# Altium PCB PCB.PcbDoc
Units mm, origin at the board's own origin, x right, y up, seen from the top; angles counter-clockwise.
Board outline 152.4 x 101.6 mm, 2 copper layers (Component Side, Bottom Layer), stack 0.325 mm thick; 47 components, 36 nets, 206 pads, 38 vias.
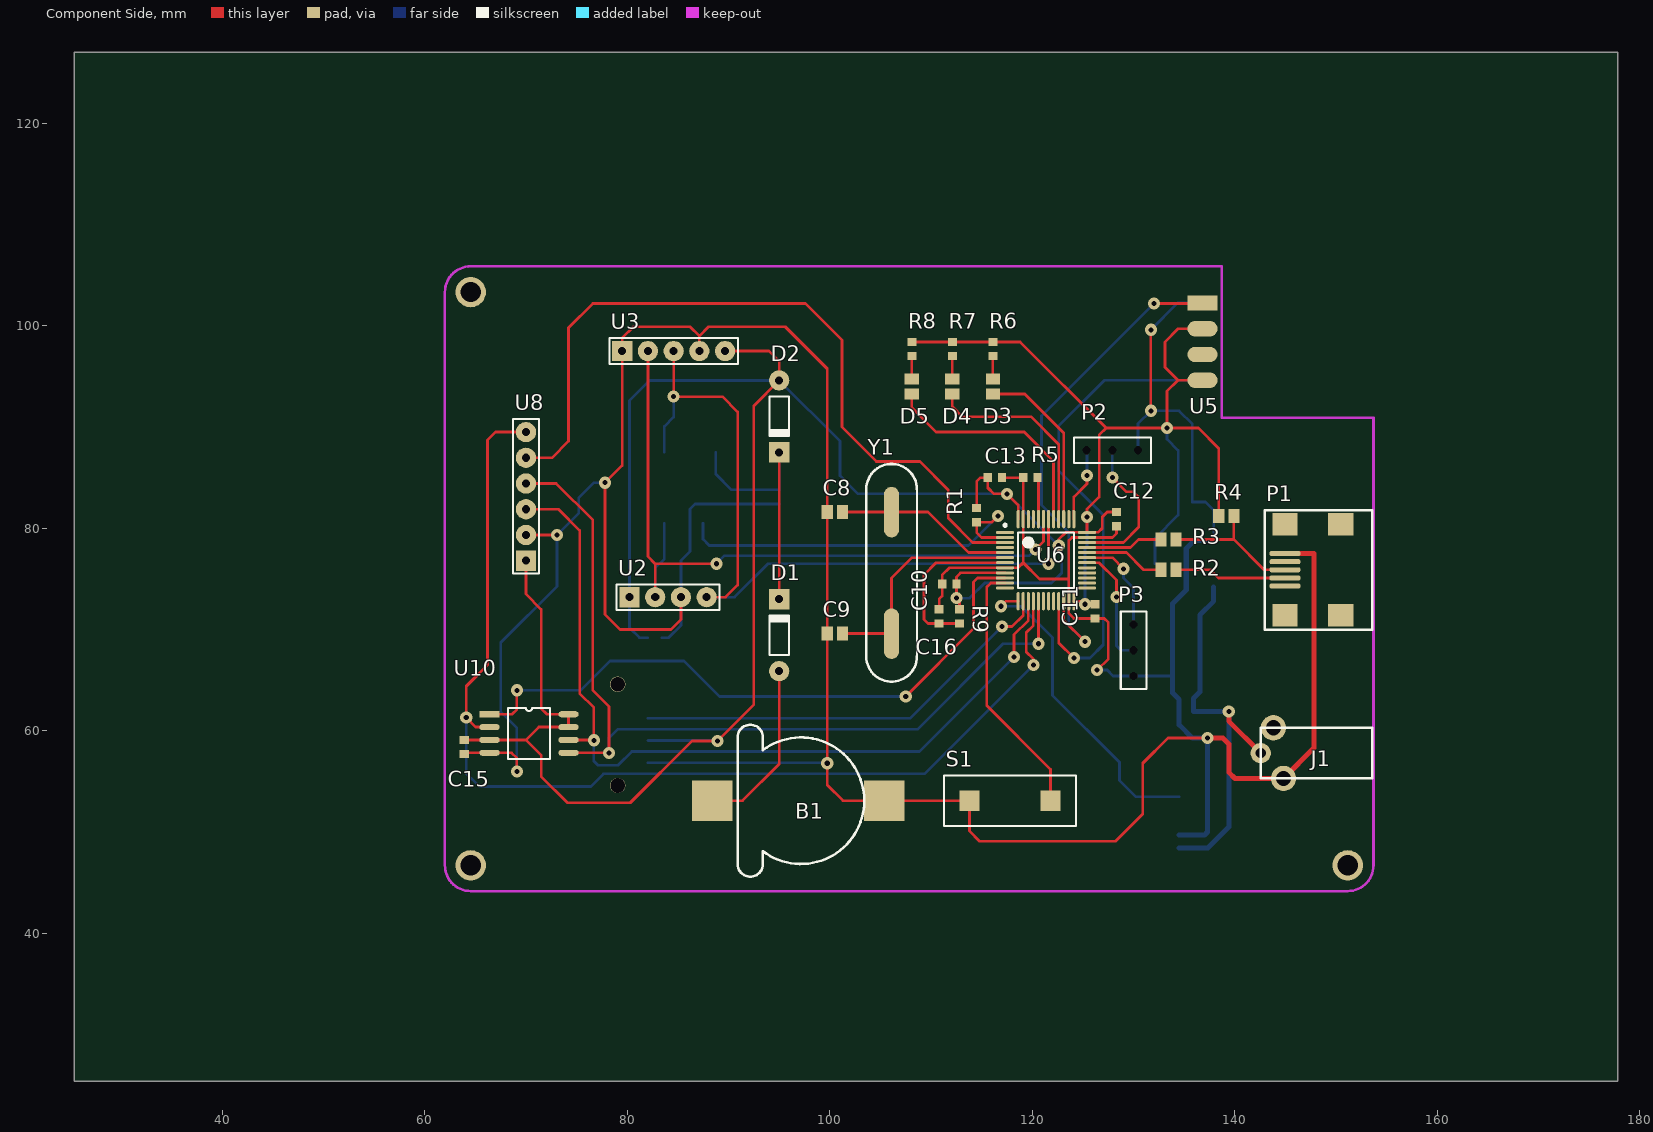
[diagram p0: Component Side view]
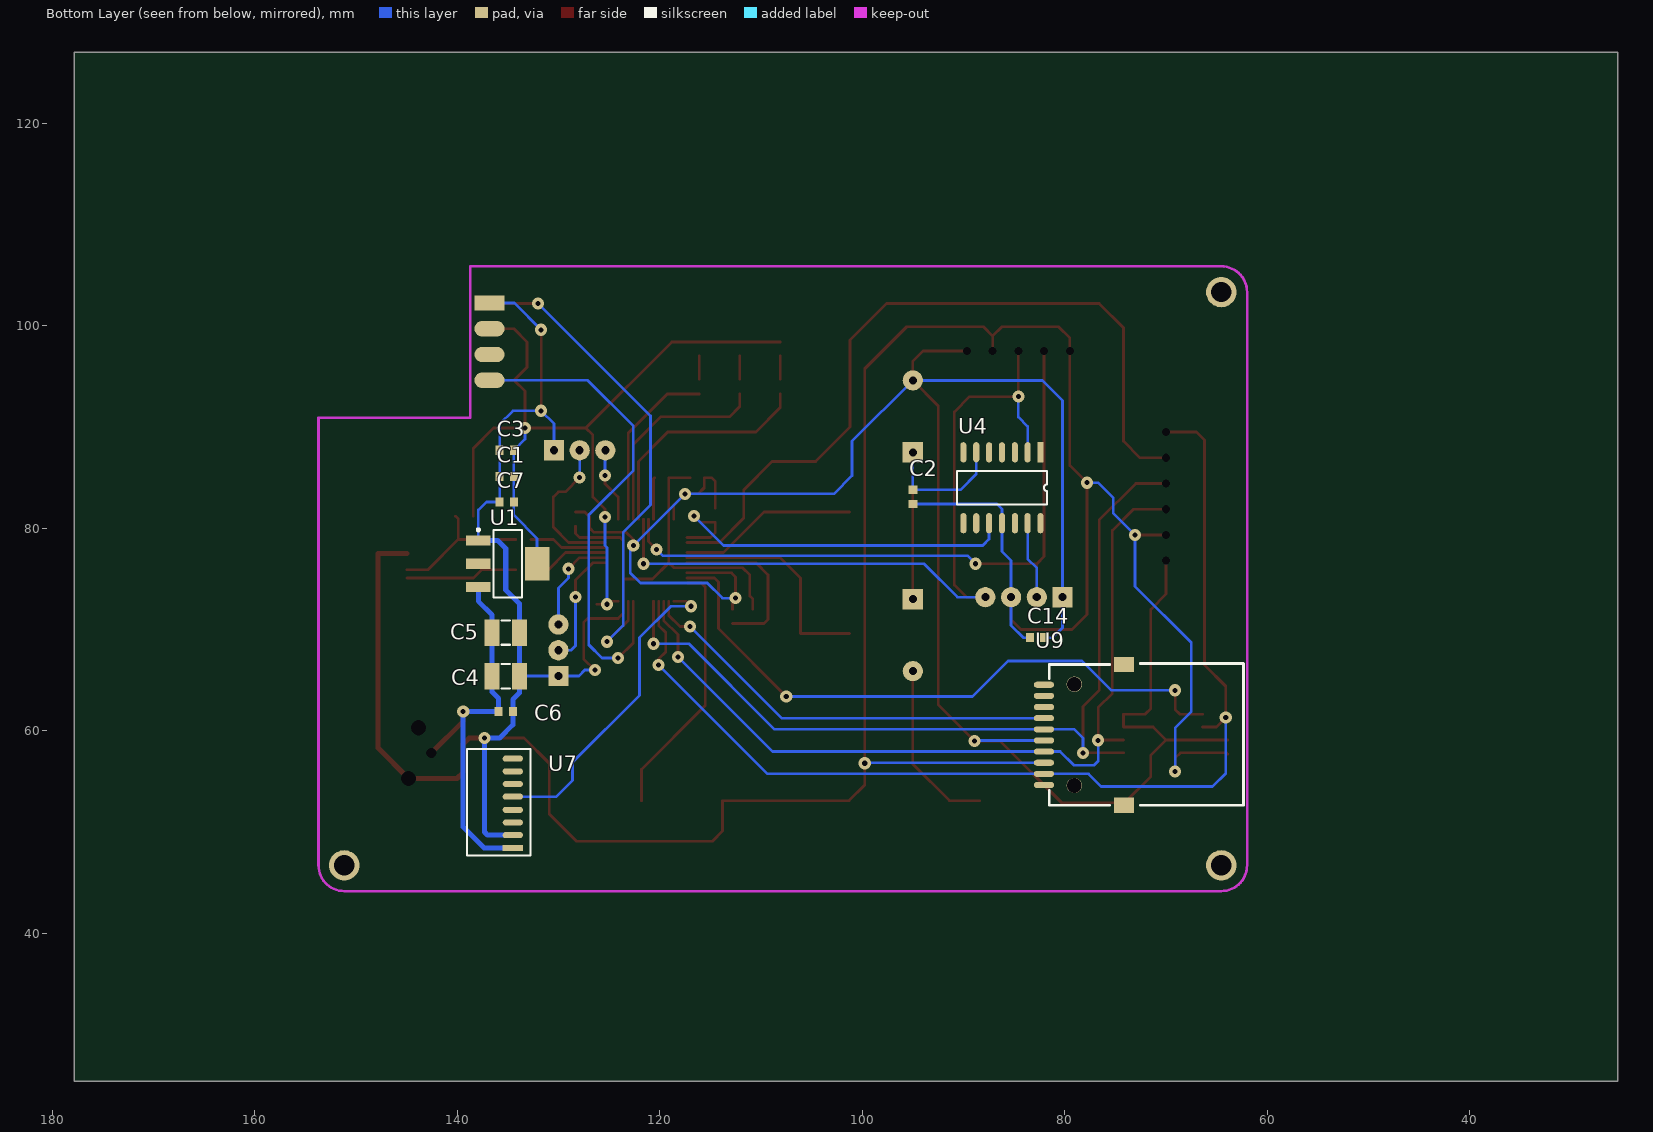
[diagram p1: Bottom Layer view, seen from below]

## Layer stack, top to bottom
Top Solder: solder mask 0.0102, Solder Resist, Dk 3.5
Component Side: signal copper 0.0356
Dielectric 1: core 0.254, FR-4, Dk 4.2
Bottom Layer: signal copper 0.0356
Solder Side: solder mask 0.0102, Solder Resist, Dk 3.5

## Board outline
25.4,25.4 177.8,25.4 177.8,127 25.4,127

## Design rules (kind name [scope] priority, off if disabled: settings)
Clearance Clearance_1 [All] p1: gap=0.1 // U6
Clearance [All] p2: gap=0.25
MinimumSolderMaskSliver [All] p1: minsoldermaskwidth=0.1
PolygonConnect [All] p1: connectstyle=Relief reliefconductorwidth=0.254 reliefentries=4 polygonreliefangle="90 Angle" airgapwidth=0.254
RoutingCorners [All] p1: cornerstyle=Round minsetback=2.54 maxsetback=2.54
RoutingTopology [All] p1: topology=Vertical
RoutingVias [All] p1: holewidth=0.5 width=1.5 viastyle="Through Hole" minholewidth=0.5 minwidth=1.5 maxholewidth=0.5 maxwidth=1.5
SilkToSolderMaskClearance [IsPad] p1: minsilkscreentomaskgap=0.1 clearancetoexposedcopper=TRUE
SolderMaskExpansion [All] p1: expansion=0.102
Width [All] p1: maxlimit=1 minlimit=0.27 preferedwidth=0.3 minimp=50.000000 maximp=50.000000 favimp=50.000000
26 further rules are at their usual default settings.

## Components (designator, comment, footprint, x,y, rotation, side; value= is the part's Value field where it differs from the comment)
B1 "CR1220" CR1220 99.65,55.6 r90 top
C1 "Cap" 1608[0603] 135.1,85.1 r180 bottom
C2 "Cap" 1608[0603] 95,83.1 r90 bottom
C3 "Cap" 1608[0603] 135.1,87.7 r180 bottom
C4 "Cap Pol1" C1210 135.2,65.4 r180 bottom
C5 "Cap Pol1" C1210 135.2,69.7 r180 bottom
C6 "Cap" 1608[0603] 135.2,61.9 r0 bottom
C7 "Cap" 1608[0603] 135.1,82.6 r180 bottom
C8 "Cap" C0805 100.5,81.6 r0 top
C9 "Cap" C0805 100.5,69.6 r0 top
C10 "Cap" 1608[0603] 111.8,74.5 r0 top
C11 "Cap" 1608[0603] 126.2,71.8 r90 top
C12 "Cap" 1608[0603] 128.3,80.9 r90 top
C13 "Cap" 1608[0603] 116.3,85 r180 top
C14 "Cap" 1608[0603] 82.72,69.2 r180 bottom
C15 "Cap" 1608[0603] 63.9,58.4 r90 top
C16 "Cap" 1608[0603] 110.8,71.3 r270 top
D1 "1N4148" DO-35 95,69.45 r90 top
D2 "1N4148" DO-35 95,91.05 r270 top
D3 "LED2" C0805 116.1,94 r270 top
D4 "LED2" C0805 112.1,94 r270 top
D5 "LED2" C0805 108.1,94 r270 top
J1 "DC-Power" DC-Power 155.05,52.8 r0 top
P1 "USB-MINI" USB-MINI 147.7,75.9 r90 top
P2 "Header 3" HDR1X3 130.44,87.7 r180 top
P3 "Header 3" HDR1X3 130,65.42 r90 top
R1 "Res2" 1608[0603] 114.5,81.3 r90 top
R2 "Res2" C0805 133.45,75.9 r180 top
R3 "Res2" C0805 133.45,78.9 r180 top
R4 "Res2" C0805 139.15,81.2 r0 top
R5 "Res2" 1608[0603] 119.8,85 r0 top
R6 "Res2" 1608[0603] 116.1,97.7 r90 top
R7 "Res2" 1608[0603] 112.1,97.7 r90 top
R8 "Res2" 1608[0603] 108.1,97.7 r90 top
R9 "Res2" 1608[0603] 112.8,71.3 r90 top
S1 "SW-PB" KEY 117.8,53.1 r0 top
U1 "AMS1117" SOT223_N 135,76.5 r180 bottom
U2 "AM2320" HDR1X4 80.22,73.2 r0 top
U3 "BH1750" HDR1X5 79.5,97.5 r0 top locked
U4 "RX8025" SOP14 86.2,84 r270 bottom
U5 "ESP8266-01S" ESP-8P 136.8,102.24 r0 top locked
U6 "STM32F103CBT6" LQFP48_N 121.35,76.85 r0 top
U7 "PM2.5" PT-8P 134.5,48.45 r0 bottom
U8 "BMP280" HDR1X6 70,76.8 r90 top locked
U9 "TF-Card" TF-Card 78.1,59.6 r90 bottom
U10 "W25QXX" SOIC8 66.4,61.64 r0 top
Y1 "8M" OSC 106.1,81.6 r270 top

## Footprints (in the part's own frame and the unit in brackets; to place one, negate y for a bottom-side part, rotate by r counter-clockwise, add the part's x,y. Pads: shape width x height; smd on the part's side, far side on the other; paste and mask are expansions set on the pad)
1608[0603] [mm] "Chip Capacitor, Body 1.6x0.8mm, IPC High Density"
  rect 0.8x0.9 smd: 1(-0.7,0) 2(0.7,0)
  body extent -0.87,-0.48 0.87,0.48, height 1.3
C0805 [mm] "Chip Capacitor, Body 2.0x1.3mm, IPC High Density"
  rect 1.1x1.4 smd: 1(-0.75,0) 2(0.75,0)
  body extent -1.1,-0.72 1.1,0.72, height 1.4
C1210 [mm] "Chip Capacitor, Body 3.2x2.5mm, IPC High Density"
  rect 1.5x2.6 smd: 1(-1.35,0) 2(1.35,0)
  silkscreen extent -0.4,-1.2 0.4,1.2, body extent -1.7,-1.35 1.7,1.35, height 1.3
CR1220 [mm]
  rect 4x4 smd: 1(-2.5,11.25) 2(-2.5,-5.75)
  silkscreen extent -10,-3.75 5,8.75
DC-Power [mm]
  round 2 / inner round 0 / far side round 0 hole 1: 1(-12.5,5)
  round 2.5 / inner round 0 / far side round 0 hole 1.5: 2(-10.25,2.5) 3(-11.25,7.5)
  silkscreen extent -12.5,2.5 -1.5,7.5
DO-35 [mm] "Diode, Axial; Body 3.8 x 1.9 mm (LxDia. max), Lead Dia. 0.53 mm (max)"
  round 2 hole 0.8: 1(-3.55,0)
  rect 2x2 hole 0.8: 2(3.55,0)
  silkscreen extent -1.95,-0.95 2.05,0.95
ESP-8P [mm]
  rect 3x1.5 smd far side: 1(0,0)
  oval 3x1.5 smd far side: 2(0,-2.54) 3(0,-5.08) 4(0,-7.62)
  oval 3x1.5 smd: 5(0,-7.62) 6(0,-5.08) 7(0,-2.54)
  rect 3x1.5 smd: 8(0,0)
HDR1X3 [mm] "Connector; Header; 3 Position"
  rect 0x0 / inner rect 0x0 / far side rect 2x2 hole 0.8: 1(0,0)
  round 0 / inner round 0 / far side round 2 hole 0.8: 2(2.54,0) 3(5.08,0)
  silkscreen extent -1.27,-1.27 6.35,1.27
HDR1X4 [mm] "Connector; Header; 4 Position"
  rect 2x2 hole 0.8: 1(0,0)
  round 2 hole 0.8: 2(2.54,0) 3(5.08,0) 4(7.62,0)
  silkscreen extent -1.27,-1.27 8.89,1.27
HDR1X5 [mm] "Connector; Header; 5 Position"
  rect 2x2 / inner rect 0x0 / far side rect 0x0 hole 0.8: 1(0,0)
  round 2 / inner round 0 / far side round 0 hole 0.8: 2(2.54,0) 3(5.08,0) 4(7.62,0) 5(10.16,0)
  silkscreen extent -1.27,-1.27 11.43,1.27
HDR1X6 [mm] "Connector; Header; 6 Position"
  rect 2x2 / inner rect 0x0 / far side rect 0x0 hole 0.8: 1(0,0)
  round 2 / inner round 0 / far side round 0 hole 0.8: 2(2.54,0) 3(5.08,0) 4(7.62,0) 5(10.16,0) 6(12.7,0)
  silkscreen extent -1.27,-1.27 13.97,1.27
KEY [mm]
  rect 2x2 smd: 1(-4,0) 2(4,0)
  silkscreen extent -6.5,-2.5 6.5,2.5
LQFP48_N [mm] "Thin QFP, 48-Leads, Body 7x7mm, Pitch 0.5mm, IPC Medium Density"
  oval 1.8x0.3 smd: 1(-4.05,2.75) 2(-4.05,2.25) 3(-4.05,1.75) 4(-4.05,1.25) 5(-4.05,0.75) 6(-4.05,0.25) 7(-4.05,-0.25) 8(-4.05,-0.75) 9(-4.05,-1.25) 10(-4.05,-1.75) 11(-4.05,-2.25) 12(-4.05,-2.75) 25(4.05,-2.75) 26(4.05,-2.25) 27(4.05,-1.75) 28(4.05,-1.25) 29(4.05,-0.75) 30(4.05,-0.25) 31(4.05,0.25) 32(4.05,0.75) 33(4.05,1.25) 34(4.05,1.75) 35(4.05,2.25) 36(4.05,2.75)
  oval 0.3x1.8 smd: 13(-2.75,-4.05) 14(-2.25,-4.05) 15(-1.75,-4.05) 16(-1.25,-4.05) 17(-0.75,-4.05) 18(-0.25,-4.05) 19(0.25,-4.05) 20(0.75,-4.05) 21(1.25,-4.05) 22(1.75,-4.05) 23(2.25,-4.05) 24(2.75,-4.05) 37(2.75,4.05) 38(2.25,4.05) 39(1.75,4.05) 40(1.25,4.05) 41(0.75,4.05) 42(0.25,4.05) 43(-0.25,4.05) 44(-0.75,4.05) 45(-1.25,4.05) 46(-1.75,4.05) 47(-2.25,4.05) 48(-2.75,4.05)
  silkscreen extent -4.17,-2.75 2.75,3.57, body extent -3.5,-3.5 3.5,3.5, height 1.6
OSC [mm]
  oval 5x1.5 smd: 1(0,0) 2(12,0)
  silkscreen extent -4.75,-2.5 16.75,2.5
PT-8P [mm]
  rect 2x0.6 smd: 1(0,0)
  oval 2x0.6 smd: 2(0,-1.25) 3(0,-2.5) 4(0,-3.75) 5(0,-5.05) 6(0,-6.3) 7(0,-7.55) 8(0,-8.8)
  silkscreen extent -1.75,-9.75 4.5,0.75
SOIC8 [mm]
  rect 2x0.6 smd: 1(0,0)
  oval 2x0.6 smd: 2(0,-1.27) 3(0,-2.54) 4(0,-3.81) 5(7.8,-3.81) 6(7.8,-2.54) 7(7.8,-1.27) 8(7.8,0)
  silkscreen extent 1.84,-4.44 5.96,0.64
SOP14 [mm]
  rect 2x0.6 smd: 1(-3.5,3.81)
  oval 2x0.6 smd: 2(-3.5,2.54) 3(-3.5,1.27) 4(-3.5,0) 5(-3.5,-1.27) 6(-3.5,-2.54) 7(-3.5,-3.81) 8(3.5,-3.81) 9(3.5,-2.54) 10(3.5,-1.27) 11(3.5,0) 12(3.5,1.27) 13(3.5,2.54) 14(3.5,3.81)
  silkscreen extent -1.67,-4.44 1.66,4.45
SOT223_N [mm] "SOT223, 4-Leads, Body 6.5x3.5mm, Pitch 2.3mm, Lead Span 7mm, IPC Medium Density"
  rect 2.4x1 smd: 1(-2.9,2.3) 2(-2.9,0) 3(-2.9,-2.3)
  rect 2.4x3.3 smd: 4(2.9,0)
  silkscreen extent -3.03,-3.35 1.4,3.47, body extent -1.85,-3.35 1.85,3.35, height 1.7
TF-Card [mm]
  rect 1.5x2 smd: 0(-6.95,-3.95) 0(6.95,-3.95)
  round 1.524 hole 1.45: 0(-5,0.95) 0(5,0.95)
  oval 0.6x2 smd: 1(2.75,3.95) 2(1.65,3.95) 3(0.55,3.95) 4(-0.55,3.95) 5(-1.65,3.95) 6(-2.75,3.95) 7(-3.85,3.95) 8(-4.95,3.95) 9(3.85,3.95) 10(4.95,3.95)
  silkscreen extent -6.95,-15.75 7.05,3.45
USB-MINI [mm]
  rect 2.2x2.5 smd: 0(-4.5,-2.75) 0(-4.5,2.75) 0(4.5,-2.75) 0(4.5,2.75)
  oval 0.5x3.1 smd: 1(-1.6,2.75) 2(-0.8,2.75) 3(0,2.75) 4(0.8,2.75) 5(1.6,2.75)
  silkscreen extent -5.9,-5.85 5.9,4.75

## Part data
B1: "CR1220电池"
C1 C2 C3 C6 C7 C8 C9 C10 C11 C12 C13 C14 C15 C16: "Capacitor"
C4 C5: "Polarized Capacitor (Radial)"
D1 D2: library part "Diode 1N4148", "High Conductance Fast Diode"
D3 D4 D5: "Typical RED, GREEN, YELLOW, AMBER GaAs LED"
P1: "USB接口"
P2 P3: "Header, 3-Pin"
R1 R2 R3 R4 R5 R6 R7 R8 R9: "Resistor"
S1: "Switch"
U1: "稳压IC"
U2: "AM2320温湿度传感器"
U3: "光照强度传感器"
U4: "RTCоƬ"
U5: "WIFI模块"
U6: "STM32 ARM-based 32-bit MCU with 128 Kbytes Flash, 48-pin LQFP, Industrial Temperature"
U7: "PM2.5传感器"
U8: "大气压传感器"
U9: "TF存储卡"
U10: "SPI-Flash"
Y1: library part XTAL, "Crystal Oscillator"

## Free pads (board coordinates)
  round 3 hole 2: 0(64.541,46.72) 0(64.541,103.32) 0(151.141,46.72)

## Via types
v1: diameter 1.2, hole 0.5, Component Side to Bottom Layer, 38 vias

## Nets (pads, with @x,y where several pads share a name; then routed paths per layer and width w, separated by ;. In a path a pad name is that pad's centre, name@x,y a point inside that pad or via, vN(x,y) a via of type N, cw(c..) or ccw(c..) an arc to the next point about the centre after c; other vN are vias at no path point)
3V3: C1.2 C3.2 C7.2 C10.2 C11.2 C12.2 C13.2 C14.2 C15.2 D2.1 R1.2 R4.1 R6.2 R7.2 R8.2 R9.2 U1.4 U2.1 U3.5 U5.5 U5.7 U6.9 U6.24 U6.36 U6.48 U8.1 U9.4 U10.3 U10.7 U10.8 | length 319.6
  Component Side w0.27: C15.2 U10.3 70,59.1 ; U8.1 70,73.5 71.5,72 71.5,62.2 72.06,61.64 U10.8 U10.7 71.27,60.37 70,59.1 ; U3.5 94,97.5 95,96.5 D2.1 92.5,92.1 92.5,62.6 v1(88.9,59) 86.4,59 80.3,52.9 74.1,52.9 71.5,55.5 71.5,57.6 70,59.1 ; R8.2 R7.2 R6.2 118.8,98.4 127.3,89.9 ; R9.2 112.8,72.8 v1(112.5,73.1) C10.2 112.5,75.2 112.9,75.6 U6.9 ; R1.2 114.5,84.6 114.9,85 C13.2 115.6,84 116.2,83.4 v1(117.5,83.4) 118.6,82.3 U6.48 ; v1(122.6,78.3) 122.6,78.9 123.3,79.6 U6.36 ; U6.24 124.9,72.8 v1(125.2,72.5) C11.2 ; C12.2 127.4,81.6 126.9,81.1 126.9,80 126.5,79.6 U6.36 ; U5.5 134.38,94.62 ; U5.7 134.4,99.7 133.1,98.4 133.1,95.9 134.38,94.62 ; R4.1 138.4,87.9 136.4,89.9 v1(133.3,89.9) ; U6.36 v1(125.4,81.1) 125.4,81.9 126.6,83.1 126.6,89.2 127.3,89.9 ; 127.3,89.9 v1(133.3,89.9) ; v1(133.3,89.9) 133.3,93.54 134.38,94.62
  Bottom Layer w0.27: C14.2 81.2,69.2 80.22,70.18 U2.1 80.22,92.62 82.2,94.6 D2.1 101,88.6 101,85.2 102.8,83.4 v1(117.5,83.4) v1(122.6,78.3) 122.9,78 122.9,75.6 121.9,74.6 115.3,74.6 113.8,73.1 v1(112.5,73.1) ; U9.4 88.85,59.05 v1(88.9,59) ; v1(125.2,72.5) 125.2,78.1 125.4,78.3 v1(125.4,81.1) ; U1.4 132.1,79 134.4,81.3 C7.2 C1.2 C3.2 133.3,88.8 v1(133.3,89.9)
5V: C4.1 C5.1 C6.2 J1.1 U1.3 U7.1 | length 39.2
  Component Side w0.5: v1(139.4,61.9) 139.4,60.95 J1.1
  Bottom Layer w0.5: U7.1 137.35,48.45 139.4,50.5 v1(139.4,61.9) C6.2 135.9,63.2 136.55,63.85 C4.1 C5.1 136.55,71.45 137.9,72.8 U1.3
GND: B1.2 C1.1 C2.1 C3.1 C4.2 C5.2 C6.1 C7.1 C8.1 C9.1 C10.1 C11.1 C12.1 C13.1 C14.1 C15.1 C16.1 J1.2 P1.5 P2.1 P3.1 R5.1 S1.1 U1.1 U2.3 U3.1 U3.4 U4.11 U5.1 U6.8 U6.23 U6.35 U6.47 U7.2 U8.2 U9.6 U10.4 | length 406.1
  Component Side w0.27: C15.1 64.03,57.83 U10.4 68.57,57.83 69.1,57.3 v1(69.1,56) ; U8.2 v1(73.06,79.34) ; U2.3 85.3,71 84.3,70 79.3,70 77.8,71.5 v1(77.8,84.5) 79.5,86.2 U3.1 79.5,98.8 80.6,99.9 86.2,99.9 87.12,98.98 ; U3.4 87.12,98.98 ; C16.1 110.8,73 111.1,73.3 C10.1 111.1,75.4 111.8,76.1 U6.8 118.6,76.1 119.1,76.6 ; C13.1 R5.1 U6.47 119.1,76.6 ; v1(126.4,66) 127.5,67.1 127.5,70.7 127.1,71.1 C11.1 124.1,71.1 123.6,71.6 U6.23 123.6,75 ; C12.1 128.3,79.5 127.9,79.1 U6.35 123.9,79.1 123.6,78.8 123.6,75 ; v1(131.7,91.6) v1(131.7,99.6) ; v1(137.3,59.3) 133.4,59.3 130.9,56.8 130.9,51.8 128.2,49.1 114.8,49.1 113.8,50.1 S1.1 B1.2 101.3,53.1 99.75,54.65 v1(99.75,56.8) C9.1 C8.1 99.75,95.75 95.6,99.9 88.04,99.9 87.12,98.98 ; 119.1,76.6 120.7,75 123.6,75
  Component Side w0.5: v1(137.3,59.3) 138.8,59.3 139.4,58.7 139.4,55.9 140,55.3 J1.2 147.8,58.3 147.8,77.5 P1.5
  Bottom Layer w0.27: v1(69.1,56) 69.1,60.3 67.5,61.9 67.5,68.7 73.06,74.26 v1(73.06,79.34) 75.2,81.48 75.2,83 76.7,84.5 v1(77.8,84.5) ; U9.6 99.7,56.85 v1(99.75,56.8) ; C14.1 84.1,69.2 85.3,70.4 U2.3 85.3,76.8 86.2,77.7 U4.11 86.2,81.9 86.7,82.4 C2.1 ; v1(126.4,66) 127.4,66 127.98,65.42 P3.1 133.83,65.42 C4.2 ; P2.1 130.44,90.34 v1(131.7,91.6) 134.5,91.6 135.8,90.3 C3.1 C1.1 C7.1 137.1,82.6 137.9,81.8 U1.1 ; v1(131.7,99.6) 134.34,102.24 U5.1
  Bottom Layer w0.5: U7.2 137,49.7 137.3,50 v1(137.3,59.3) 135.8,59.3 134.5,60.6 C6.1 134.5,63.1 133.85,63.75 C4.2 C5.2 133.85,72.55 135.2,73.9 135.2,78 136,78.8 U1.1
NetB1_+: B1.1 D1.1 | length 17.3
  Component Side w0.27: B1.1 91.4,53.1 95,56.7 D1.1
NetC2_2: C2.2 D1.2 D2.2 U4.6 | length 27.2
  Component Side w0.27: D1.2 D2.2
  Bottom Layer w0.27: U4.6 88.74,85.36 90.3,83.8 C2.2 D2.2
NetC8_2: C8.2 U6.5 Y1.1 | length 17.7
  Component Side w0.27: C8.2 Y1.1 109.7,81.6 113.7,77.6 U6.5
NetC9_2: C9.2 U6.6 Y1.2 | length 22.4
  Component Side w0.27: C9.2 Y1.2 106.1,75.1 108.1,77.1 U6.6
NetC16_2: C16.2 R9.1 U6.7 | length 16.6
  Component Side w0.27: R9.1 109.7,70.6 109.3,71 109.3,75.4 110.5,76.6 U6.7
NetD3_1: D3.1 R6.1 | length 2.3
  Component Side w0.27: D3.1 R6.1
NetD3_2: D3.2 U6.39 | length 17.1
  Component Side w0.27: D3.2 119.25,93.25 123.1,89.4 U6.39
NetD4_1: D4.1 R7.1 | length 2.3
  Component Side w0.27: D4.1 R7.1
NetD4_2: D4.2 U6.40 | length 20.7
  Component Side w0.27: D4.2 112.1,92 113.1,91 119.9,91 122.6,88.3 U6.40
NetD5_1: D5.1 R8.1 | length 2.3
  Component Side w0.27: D5.1 R8.1
NetD5_2: D5.2 U6.41 | length 23.2
  Component Side w0.27: D5.2 108.1,91.9 110.5,89.5 119.2,89.5 122.1,86.6 U6.41
NetP1_2: P1.2 R2.1 | length 11.1
  Component Side w0.27: R2.1 137.6,75.9 138.4,75.1 P1.2
NetP1_3: P1.3 R3.1 R4.2 | length 14.4
  Component Side w0.27: R3.1 139.9,78.9 ; R4.2@140.15,81.2 139.9,80.95 139.9,78.9 ; P1.3 142.9,75.9 139.9,78.9
NetR1_1: R1.1 U4.10 U6.2 | length 38.5
  Component Side w0.27: v1(116.6,81.2) 116,80.6 R1.1 114.5,79.6 115,79.1 U6.2
  Bottom Layer w0.27: U4.10 87.47,78.93 88.1,78.3 113.7,78.3 v1(116.6,81.2)
NetR2_2: R2.2 U6.32 | length 8
  Component Side w0.27: U6.32 129.3,77.6 131,75.9 R2.2
NetR3_2: R3.2 U6.33 | length 7.6
  Component Side w0.27: U6.33 129.7,78.1 130.5,78.9 R3.2
NetR5_2: R5.2 U6.44 | length 4.1
  Component Side w0.27: R5.2 120.6,84.9 U6.44
NetS1_2: S1.2 U6.11 | length 25.7
  Component Side w0.27: U6.11 115.9,74.6 115.5,74.2 115.5,62.5 121.8,56.2 S1.2
NetU5_4: U5.4 U6.21 | length 49.2
  Component Side w0.27: U6.21 122.6,68.7 v1(124.1,67.2)
  Bottom Layer w0.27: v1(124.1,67.2) 125.7,67.2 127,68.5 127,81.3 122.6,85.7 122.6,90.1 127.12,94.62 U5.4
NetU5_8: U5.8 U6.22 | length 49.5
  Component Side w0.27: U6.22 123.1,70.9 v1(125.2,68.8) ; v1(132,102.2) 136.76,102.2 U5.8
  Bottom Layer w0.27: v1(125.2,68.8) 123.6,70.4 123.6,79.6 120.9,82.3 120.9,91.1 v1(132,102.2)
NetU6_3: U6.3 U8.5 | length 76.6
  Component Side w0.27: U8.5 72.56,86.96 74.2,88.6 74.2,99.8 76.6,102.2 97.6,102.2 101.2,98.6 101.2,90 104.6,86.6 108.9,86.6 111.7,83.8 111.7,81 114.1,78.6 U6.3
NetU6_10: U6.10 U10.1 | length 63.2
  Component Side w0.27: U10.1 68.64,61.64 69.1,62.1 v1(69.1,64) ; v1(107.5,63.4) 114.2,70.1 114.2,74.7 114.6,75.1 U6.10
  Bottom Layer w0.27: v1(69.1,64) 75.4,64 78.3,66.9 85.6,66.9 89.1,63.4 v1(107.5,63.4)
NetU6_13: U6.13 U7.5 | length 31.7
  Component Side w0.27: v1(116.9,72.3) 117.4,72.8 U6.13
  Bottom Layer w0.27: v1(116.9,72.3) 118.9,72.3 122,69.2 122,63.5 128.6,56.9 128.6,55.1 130.2,53.5 U7.5
NetU6_14: U6.14 U9.2 | length 42.7
  Component Side w0.27: v1(117,70.3) 118,70.3 119.1,71.4 U6.14
  Bottom Layer w0.27: U9.2 107.95,61.25 v1(117,70.3)
NetU6_15: U6.15 U8.3 U9.5 U10.6 | length 84.2
  Component Side w0.27: U8.3 73.22,81.88 75.3,79.8 75.3,63.7 76.7,62.3 v1(76.7,59.065) 76.665,59.1 U10.6 ; v1(118.2,67.3) 118.2,69.5 119.6,70.9 U6.15
  Bottom Layer w0.27: v1(76.7,59.065) 76.7,57 77.1,56.6 79.1,56.6 80.45,57.95 U9.5 108.85,57.95 v1(118.2,67.3)
NetU6_16: U6.16 U8.6 U9.7 U10.2 | length 109
  Component Side w0.27: U10.2 65.03,60.37 v1(64.1,61.3) 64.1,64.4 66.2,66.5 66.2,88.7 67,89.5 U8.6 ; v1(120.1,66.5) 120.1,67.1 119.4,67.8 119.4,69.7 120.1,70.4 U6.16
  Bottom Layer w0.27: v1(64.1,61.3) 64.1,55.8 65.4,54.5 76.4,54.5 77.65,55.75 U9.7 109.35,55.75 v1(120.1,66.5)
NetU6_17: U6.17 U8.4 U9.3 U10.5 | length 87.7
  Component Side w0.27: U8.4 72.98,84.42 76.6,80.8 76.6,64 78.2,62.4 v1(78.2,57.795) 78.165,57.83 U10.5 ; v1(120.6,68.6) U6.17
  Bottom Layer w0.27: v1(78.2,57.795) 78.2,59.3 79.05,60.15 U9.3 108.65,60.15 117.1,68.6 v1(120.6,68.6)
RXD: P3.3 U6.31 | length 10
  Component Side w0.27: U6.31 127.9,77.1 v1(129,76)
  Bottom Layer w0.27: v1(129,76) 129,75.1 130,74.1 P3.3
SCL: U2.4 U3.3 U4.2 U6.42 | length 77.5
  Component Side w0.27: U3.3 v1(84.58,93) 89.4,93 90.9,91.5 90.9,74.4 89.7,73.2 U2.4 ; v1(121.6,76.5) U6.42
  Bottom Layer w0.27: U4.2 83.66,90.06 84.58,90.98 v1(84.58,93) ; U2.4 90.6,73.2 93.9,76.5 v1(121.6,76.5)
SDA: U2.2 U3.2 U4.13 U6.43 | length 73.7
  Component Side w0.27: U3.2 82.04,77.22 82.76,76.5 ; U2.2 82.76,76.5 ; v1(88.8,76.5) 82.76,76.5 ; v1(120.3,77.9) 121.1,78.7 U6.43
  Bottom Layer w0.27: U2.2 82.76,76.06 83.66,76.96 U4.13 ; v1(88.8,76.5) 89.6,77.3 119.7,77.3 v1(120.3,77.9)
SWCLK: P2.3 U6.37 | length 7.4
  Component Side w0.27: U6.37 124.1,83.1 125.4,84.4 v1(125.4,85.2)
  Bottom Layer w0.27: P2.3 125.3,87.64 125.4,87.54 v1(125.4,85.2)
SWDIO: P2.2 U6.34 | length 14.8
  Component Side w0.27: U6.34 129,78.6 130.5,80.1 130.5,83.1 130,83.6 129.3,83.6 v1(127.9,85)
  Bottom Layer w0.27: v1(127.9,85) P2.2
TXD: P3.2 U6.30 | length 12
  Component Side w0.27: U6.30 126.6,76.6 128.3,74.9 v1(128.3,73.2)
  Bottom Layer w0.27: v1(128.3,73.2) 128.3,68.4 128.74,67.96 P3.2
pads on no net: J1.3 P1.0 P1.1 P1.4 U1.2 U4.1 U4.3 U4.4 U4.5 U4.7 U4.8 U4.9 U4.12 U4.14 U5.2 U5.3 U5.6 U6.1 U6.4 U6.12 U6.18 U6.19 U6.20 U6.25 U6.26 U6.27 U6.28 U6.29 U6.38 U6.45 U6.46 U7.3 U7.4 U7.6 U7.7 U7.8 U9.0 U9.1 U9.8 U9.9 U9.10

## Keep-outs
Keep-Out Layer:
  lines w0.254: 138.7,90.921 138.7,105.866 64.541,105.866 ccw(c64.541,103.32) 61.995,103.32 61.995,46.72 ccw(c64.541,46.72) 64.541,44.174 151.141,44.174 ccw(c151.141,46.72) 153.687,46.72 153.687,90.9 138.721,90.9

## Silkscreen, mask and mechanical layers (free items; w line width, h text height)
Mechanical 1:
  lines w0.254: 138.7,90.921 138.721,90.9